# Allegro board unnamed.brd
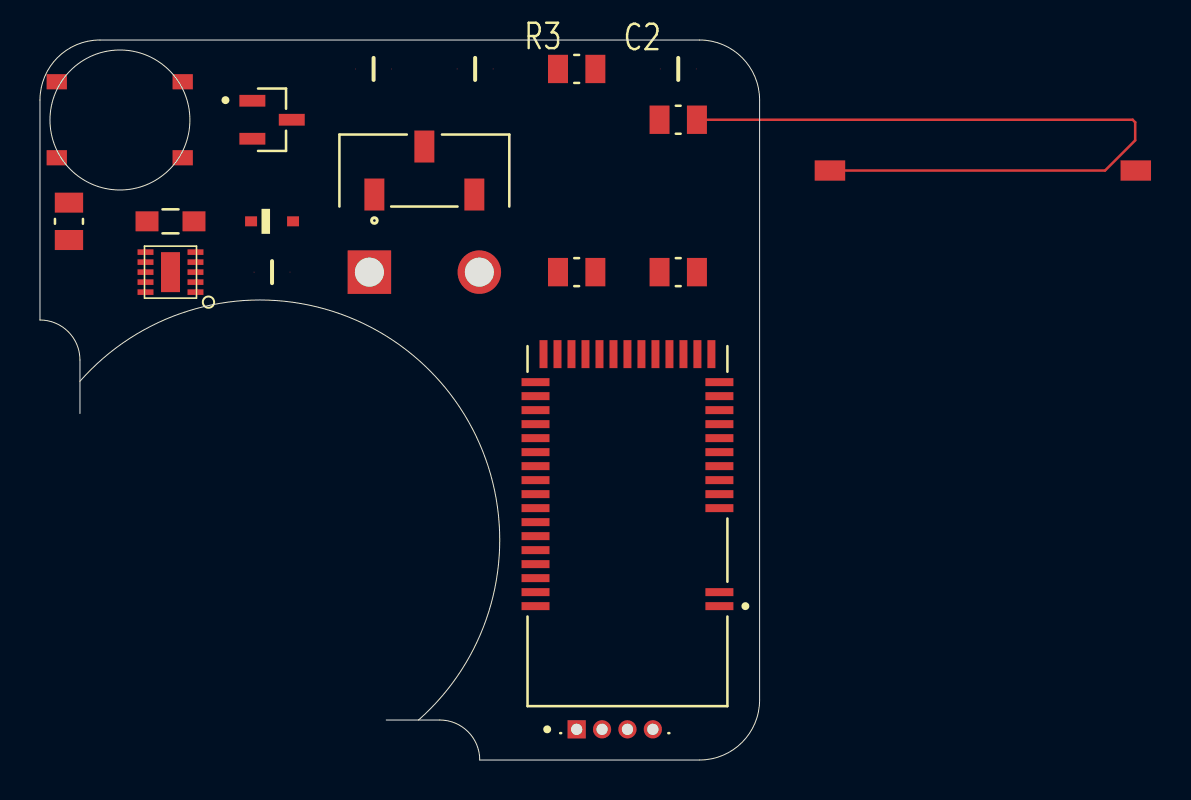
[diagram p0: board, top side]
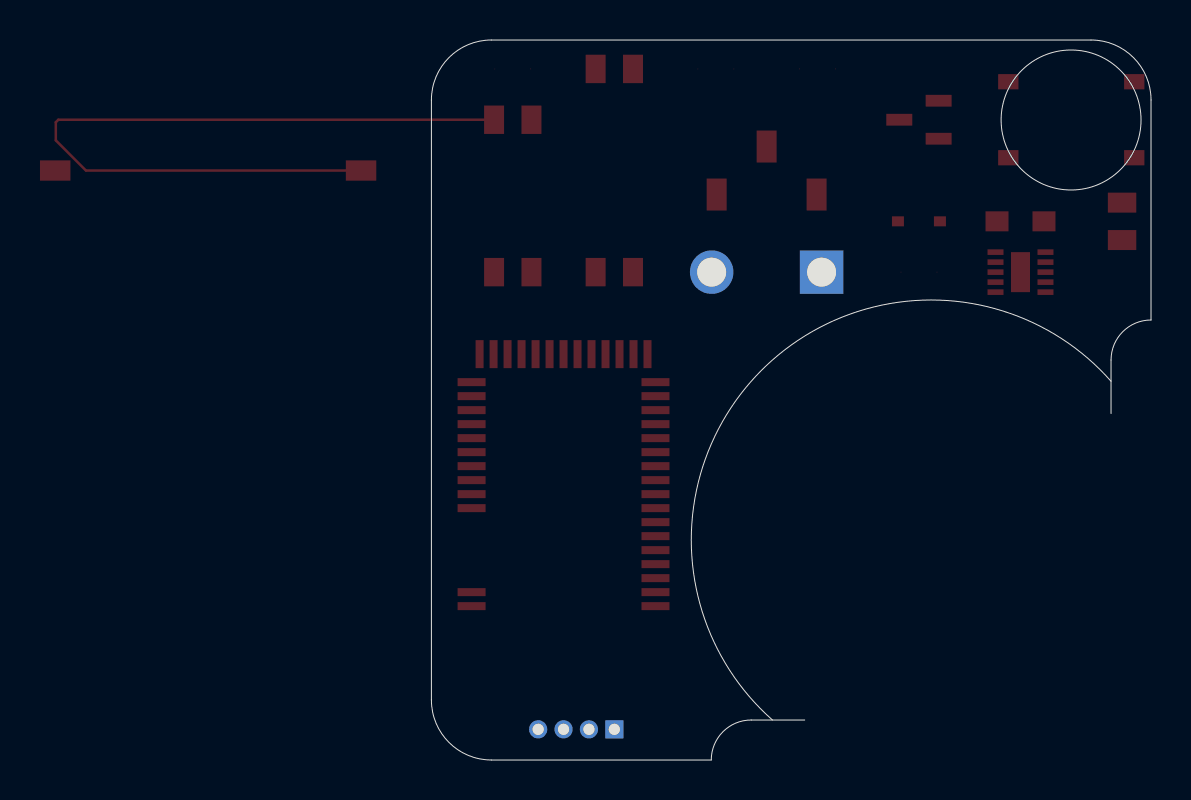
[diagram p1: board, bottom side, seen from below]

Outline 36 x 36 mm; copper layers: TOP, BOTTOM. Coordinates in mm from the lower left corner of the outline.
Outline path: circle c4,32 r3.5 ; 2,18.94 arc(19.49,19.49) 18.94,2 ; 2,17.32 2,20 arc(1.41,21.41) 0,22 0,33 arc(0.88,35.12) 3,36 33,36 arc(35.12,35.12) 36,33 36,3 arc(35.12,0.88) 33,0 22,0 arc(21.41,1.41) 20,2 17.32,2

## Placement (name value [footprint] x y rotation side)
C1  1uF  [CAPC2012X140N]  11.61 24.39 0 top
C2  4.7uF  [CAPC2012X140N]  31.93 34.55 0 top
C3  10uF  [CAPC2012X140N]  21.77 34.55 0 top
C4  1uF  [CAPC2012X140N]  16.69 34.55 0 top
D1  1N4148WSQ-7-F  [SOD2513X120N]  11.61 26.93 0 top
J1  0039296028  [MOLEX_0039296028]  19.23 24.39 90 top
J2  2-104186-1  [TE_2-104186-1]  26.85 1.53 0 top
L1  MLF2012K390KTD25  [INDC2012X87N]  6.53 26.93 0 top
LS1  CMT-1603-SMT  [CUI_CMT-1603-SMT]  47.17 29.47 0 top
Q1  WNM2016-3-TR  [SOT95P240X115-3N]  11.61 32.01 0 top
R1  2K  [RESC2012X60N]  1.45 26.93 90 top
R2  100K  [RESC2012X60N]  31.93 32.01 0 top
R3  100K  [RESC2012X60N]  26.85 34.55 0 top
R4  1K  [RESC2012X60N]  26.85 24.39 0 top
R5  47K  [RESC2012X60N]  31.93 24.39 0 top
S2  JS102011JCQN  [SW_JS102011JCQN]  19.23 29.47 0 top
SW1  TL3342F160QG  [SW_TL3342F160QG]  3.99 32.01 0 top
U2  TPS63031  [10SON]  6.53 24.39 90 top
U?  MDBT40-256RV3  [MODULE_MDBT40-256RV3]  29.39 11.69 180 top

## Library data of the parts
C1-C4 = Cap- 0805
D1 = 1N4148WSQ-7-F
J1 = 2-pin Connector
J2 = Pin Header
L1 = Inductor
LS1 = Buzzer
Q1 = N Channel MOSFET
R1-R5 = Resisitor - 0805
S2 = JS102011JCQN
SW1 = Push Button
U2 = TPS63031
U? = Bluetooth

## Footprints (pads in the part's own frame, mm; a bottom-side part is the same pattern mirrored in y, then rotated)
10SON
  rect 0.28x0.8 smd: 1(-1,-1.25) 2(-0.5,-1.25) 3(0,-1.25) 4(0.5,-1.25) 5(1,-1.25) 6(1,1.25) 7(0.5,1.25) 8(0,1.25) 9(-0.5,1.25) 10(-1,1.25)
  rect 2x0.95 smd: EXP(0,0)
CAPC2012X140N
  rect 0.029x0.037 smd: 1(-0.9,0) 2(0.9,0)
CUI_CMT-1603-SMT
  rect 1.524x1.016 smd: 1(-7.65,0) 2(7.65,0)
INDC2012X87N
  rect 1.15x1 smd: 1(-1.175,0) 2(1.175,0)
MODULE_MDBT40-256RV3
  rect 1.4x0.4 smd: 1(-4.6,4) 2(-4.6,3.3) 3(-4.6,-0.9) 4(-4.6,-1.6) 5(-4.6,-2.3) 6(-4.6,-3) 7(-4.6,-3.7) 8(-4.6,-4.4) 9(-4.6,-5.1) 10(-4.6,-5.8) 11(-4.6,-6.5) 12(-4.6,-7.2) 26(4.6,-7.2) 27(4.6,-6.5) 28(4.6,-5.8) 29(4.6,-5.1) 30(4.6,-4.4) 31(4.6,-3.7) 32(4.6,-3) 33(4.6,-2.3) 34(4.6,-1.6) 35(4.6,-0.9) 36(4.6,-0.2) 37(4.6,0.5) 38(4.6,1.2) 39(4.6,1.9) 40(4.6,2.6) 41(4.6,3.3) 42(4.6,4)
  rect 0.4x1.4 smd: 13(-4.2,-8.6) 14(-3.5,-8.6) 15(-2.8,-8.6) 16(-2.1,-8.6) 17(-1.4,-8.6) 18(-0.7,-8.6) 19(0,-8.6) 20(0.7,-8.6) 21(1.4,-8.6) 22(2.1,-8.6) 23(2.8,-8.6) 24(3.5,-8.6) 25(4.2,-8.6)
MOLEX_0039296028
  rect 2.175x2.175 hole 1.45: 1(0,2.75)
  round 2.175 hole 1.45: 2(0,-2.75)
RESC2012X60N
  rect 1x1.42 smd: 1(-0.935,0) 2(0.935,0)
SOD2513X120N
  rect 0.6x0.5 smd: A(1.05,0) C(-1.05,0)
SOT95P240X115-3N
  rect 1.3x0.59 smd: 1(-0.985,0.95) 2(-0.985,-0.95) 3(0.985,0)
SW_JS102011JCQN
  rect 1x1.6 smd: 1(-2.5,-1.2) 2(0,1.2) 3(2.5,-1.2)
SW_TL3342F160QG
  rect 1.016x0.762 smd: 1(-3.15,-1.9) 2(3.15,-1.9) 3(-3.15,1.9) 4(3.15,1.9)
TE_2-104186-1
  rect 0.91x0.91 hole 0.56: 1(0,0)
  round 0.91 hole 0.56: 2(1.27,0) 3(2.54,0) 4(3.81,0)

## Nets
3.3V: C1.1 C3.2 C4.2 D1.C J2.1 LS1.1 R2.2 R3.2 S2.1 SW1.3 U2.1(VOUT) U2.10(FB) U?.3(AVDD) U?.14(VDD)
GND_POWER: C1.2 C2.1 C3.1 C4.1 J1.2 J2.2 Q1.2(S) R4.2 R5.1 S2.3 U2.3(PGND) U2.9(GND) U?.1(GND) U?.2(GND__1) U?.13(GND__2) U?.16(P0.30) U?.25(GND__3) U?.42(GND__4)
BUTTON: SW1.4 U?.6(P0.23)
BUZZER: Q1.1(G) R5.2 U?.5(P0.22)
CTS_3V: R2.1 U?.28(P0.10)
DCC: U?.15(DCC)
DEC2: U?.41(DEC2)
MODE_3V: R1.1 U?.18(P0.01/AIN2)
RXD_3V: R3.1 U?.29(P0.11)
SWCLK: J2.4 U?.36(SWCLK)
SWDIO: J2.3 U?.35(SWDIO/RESET)
N00675: L1.2 U2.4(L1)
N00727: L1.1 U2.2(L2)
N00847: C2.2 J1.1 U2.5(VIN) U2.6(EN) U2.7(PS/SYNC) U2.8(VINA)
N03991: D1.A LS1.2 Q1.3(D)
N13311: R1.2 S2.2
N083160: R4.1 SW1.2

Pads without a net: SW1 1; U2 EXP; U? 4 7 8 9 10 11 12 17 19 20 21 22 23 24 26 27 30 31 32 33 34 37 38 39 40

## Routing (per net, layer and track width the routed paths; a pad name or vN(x,y) marks a point on that pad's centre or on a via; arc(x,y) is an arc through that point)
3.3V: length 38.8
  TOP w0.127: LS1.1 53.28,29.47 54.79,30.98 54.79,31.89 54.66,32.01 R2.2
